# Altium PCB PROC091F.PcbDoc (part 5 of 8)
Units mil, origin at the board's own origin, x right, y up, seen from the top; angles counter-clockwise.
Board outline 3590.95 x 906.17 mil, 8 copper layers (Top Layer, GND1, Sig1, PWR1, PWR2, Sig2, GND2, Bottom Layer), stack 63.146 mil thick; 420 components, 316 nets, 1432 pads, 774 vias.
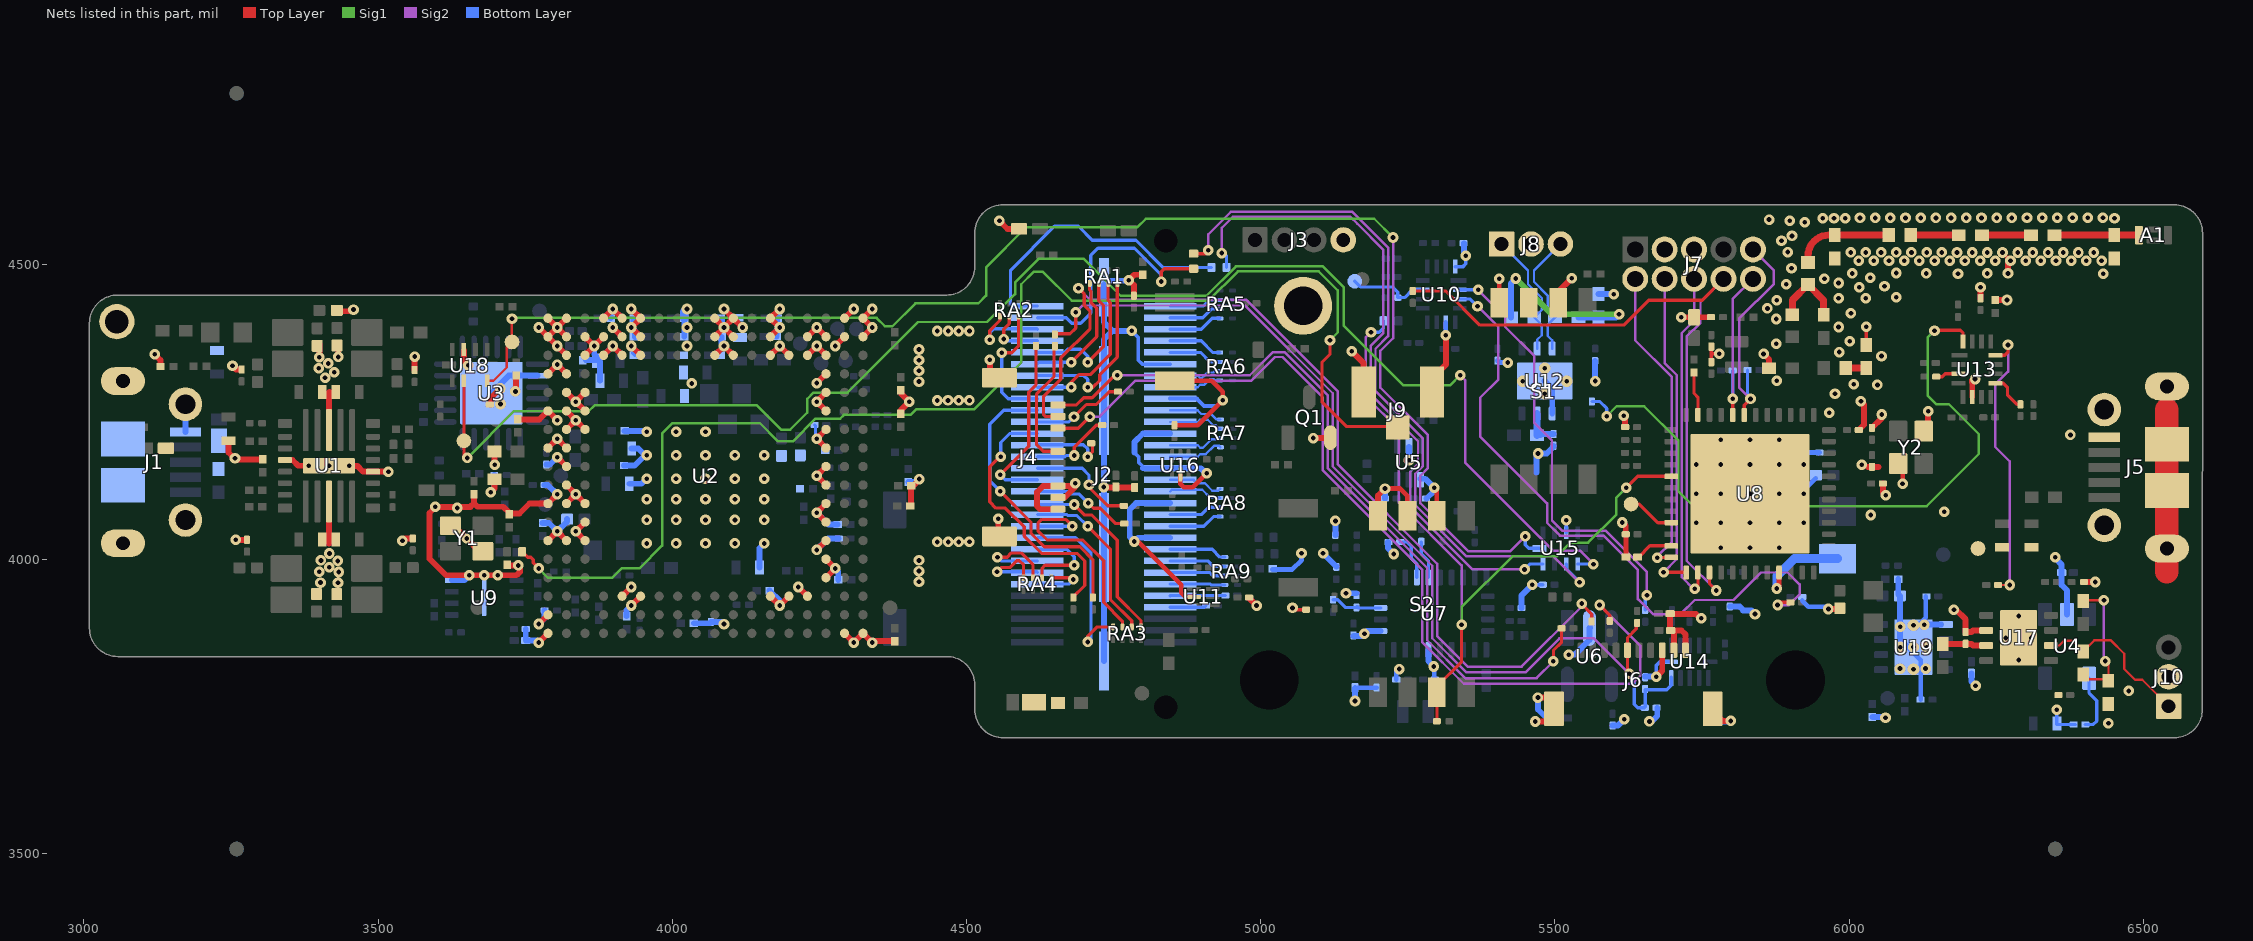
[diagram p10: the nets of this part, all layers, seen from the top]

## Via types
v1: diameter 18, hole 8, Top Layer to Bottom Layer, tented both sides, 737 vias
v2: diameter 19.68, hole 7.87, Top Layer to Bottom Layer, tented both sides, 36 vias
v3: diameter 17, hole 8, Top Layer to Bottom Layer, tented both sides, 1 vias

## Nets (pads, with @x,y where several pads share a name; then routed paths per layer and width w, separated by ;. In a path a pad name is that pad's centre, name@x,y a point inside that pad or via, vN(x,y) a via of type N, cw(c..) or ccw(c..) an arc to the next point about the centre after c; other vN are vias at no path point) (continued)
BOOTN: R80.2 R96.1 U7.4 | length 89.9
  Bottom Layer w5.5: R80.2@5123,3931 5130.87,3931 5142.87,3919 5143,3919 ; 5142,3920 5143,3919 ; R96.1@5162.8,3917.57 5144.43,3917.57 5143,3919 ; R96.1@5162.8,3919 R96.1@5163.76,3919 ; R96.1@5165,3919 R96.1@5163.76,3919 ; U7.4@5203.84,3917.06 5165.69,3917.06 R96.1@5163.76,3919
BREAK_RS232RX: TP19.1 U15.6 U18.7 | length 2663.5
  Top Layer w5.5: U18.7@3645.95,4303.01 TP19.1@3645.95,4200.94 3645.95,4177.64 v1(3651.7,4171.89)
  Sig1 w4.2: v1(3651.7,4171.89) 3651.8,4171.89 3731.31,4251.4 3858.11,4251.4 3867.87,4261.15 4143.84,4261.15 4184.81,4220.18 4200.56,4220.18 4229.37,4248.99 4229.37,4272.16 4240.11,4282.89 4297.89,4282.89 4417.91,4402.91 4534.91,4402.91 4582.46,4450.46 4582.46,4470.35 4622.27,4510.16 4699.37,4510.16 4761.92,4447.6 4908.02,4447.6 4957.82,4497.4 5105.6,4497.4 5141.34,4461.66 5141.34,4396.41 5242.09,4295.66 5322.29,4295.66 v1(5339,4312.38)
  Sig2 w4.2: v1(5339,4312.38) 5347.73,4303.65 5347.73,4248.79 ; 5347.71,4215.22 5347.71,4248.78 ; 5347.73,4215.21 5347.73,4163.41 5496.63,4014.5 5542.33,4014.5 v1(5565.37,3991.46)
  Bottom Layer w5.5: U15.6@5538.73,3991.77 5539.04,3991.46 v1(5565.37,3991.46)
BREAK_RS232TX: TP18.1 U15.10 U18.9 | length 2513.4
  Top Layer w4.2: U18.9@3685.32,4303.01 3695.92,4303.01 3718.72,4325.81 3718.72,4360.18 TP18.1@3727.56,4369.01 v1@3727.56,4409.77
  Sig1 w4.2: v1@3727.56,4409.77 4347.13,4409.77 4361.3,4395.61 4373.97,4395.61 4413.02,4434.66 4519.99,4434.66 4533.24,4447.91 4533.24,4495.82 4601.57,4564.15 4790.54,4564.15 4804.73,4578.34 5192.99,4578.34 v1(5224.85,4546.48)
  Sig2 w4.2: v1(5224.85,4546.48) 5224.85,4375.38 5203.48,4354.01 5203.48,4291.19 5284.08,4210.6 5284.08,4154.51 5271.03,4141.47 5271.03,4095.28 5353.32,4012.99 5423.87,4012.99 v1(5449.37,4038.49)
  Bottom Layer w5.5: v1(5449.37,4038.49) 5449.37,4024.34 5455.37,4018.34 U15.10@5473.77,4018.34
  other v1: 3727.56,4408.57
"BT ENABLE": R30.1 R110.1 S2.3 U8.17 | length 1280.9
  Top Layer w5.5: R110.1@5299.37,3724.46 S2.3@5299.37,3773.46 5299.37,3783.46 5341.37,3825.46 v1(5341.37,3888.46) ; v1(5621,4121) 5640.64,4140.64 U8.17@5697.71,4140.64
  Sig1 w4.2: v1(5341.37,3888.46) 5341.37,3918.37 5427.68,4004.68 5502.99,4004.68 5526.3,4028 5556.37,4028 5604.37,4076 5604.37,4104.37 v1(5621,4121)
  Sig2 w4.2: v1(5187.37,4385.46) 5178.28,4376.37 5178.28,4276.72 5234.87,4220.13 5234.87,4095.8 5341.37,3989.3 v1(5341.37,3888.46)
  Bottom Layer w5.5: v1(5187.37,4385.46) 5201.11,4385.46 5208.7,4393.06 R30.1@5208.7,4404.87
BT_RST: R91.2 U10.3 | length 1123.3
  Top Layer w5.5: v1(5878.37,3921.94) 5882.89,3926.46 R91.2@5900.13,3926.46
  Sig2 w4.2: v1(5368.37,4429.85) 5403.87,4394.36 5403.87,4305.15 5372.93,4274.2 5372.93,4238.35 ; 5372.91,4225.66 5372.91,4238.34 ; 5372.93,4225.65 5372.93,4208.47 5486.6,4094.79 5486.6,4061.8 5508.4,4040 5582.47,4040 5641.07,3981.4 5641.07,3932.13 5666.73,3906.46 5713.69,3906.46 5737.69,3930.46 5803.46,3930.46 5850.2,3977.2 5895.63,3977.2 5915.77,3957.07 5915.77,3939.99 5897.72,3921.94 v1(5878.37,3921.94)
  Bottom Layer w5.5: U10.3@5338.3,4441.85 5356.37,4441.85 v1(5368.37,4429.85)
BT_UART_RX: J7.9 R90.2 U8.7 | length 384
  Top Layer w5.5: U8.7@5821.73,4244.97 5821.76,4245 5821.76,4261.53 v1(5832.37,4272.14)
  Sig2 w4.2: v1(5832.37,4272.14) 5813,4291.51 5813,4408.67 5872,4467.67 5872,4490.65 J7.9@5836.47,4526.19
  Bottom Layer w5.5: R90.2@5827.38,4321.29 5827.38,4277.13 v1(5832.37,4272.14)
BT_UART_TX: J7.10 R102.2 U8.8 | length 293.4
  Top Layer w5.5: U8.8@5802.04,4244.97 v1(5802.04,4272.45)
  Sig2 w4.2: v1(5802.04,4272.45) 5802.04,4441.76 J7.10@5836.47,4476.19
  Bottom Layer w5.5: v1(5802.04,4272.45) R102.2@5802.04,4320.41
CAN1_FD_RX: R127.2 U13.3 | length 39.7
  Top Layer w5.5: R127.2@6148,4310 6158.12,4310 6163,4314.88 U13.3@6185.63,4314.88
CAN1_FD_TX: R123.2 U13.16 | length 1168.2
  Top Layer w5.5: v1(6145,4388) 6146,4389 6189,4389 6193.5,4384.5 U13.16@6193.5,4370
  Sig1 w4.2: v1(5588,4242.75) 5604.92,4259.66 5651.61,4259.66 5710,4201.27 5710,4115 5735,4090 5992.27,4090 5992.45,4090.18 6131.82,4090.18 6220.3,4178.66 6220.3,4212.34 6169.34,4263.3 6147.7,4263.3 6133.3,4277.7 6133.3,4376.3 v1(6145,4388)
  Bottom Layer w5.5: R123.2@5563,4267.77 5576.23,4267.77 5588,4256 v1(5588,4242.75)
CAN2_FD_RX: R120.2 U13.9 | length 65
  Top Layer w5.5: U13.9@6248.62,4299.13 6262,4299.13 6269,4292.13 6269,4279.1 6285.1,4263 R120.2@6291,4263
CAN2_FD_TX: R116.2 U13.12 | length 483.1
  Top Layer w4: R116.2@6252.99,3956 v1(6272.97,3956)
  Top Layer w5.5: U13.12@6248.62,4346.38 6264.28,4346.38 6270,4352.1 v1(6270,4364)
  Sig2 w4.2: v1(6270,4364) 6270,4318.7 6248,4296.7 6248,4191 6272.97,4166.03 v1(6272.97,3956)
CLKSEL0: R82.2 U7.10 | length 65.5
  Bottom Layer w5.5: R82.2@5272.85,4029.17 5272.85,4009.38 5285.04,3997.19 U7.10@5285.04,3968.74
CONN_AR_RS232RX: R14.2 U15.7 | length 1259.6
  Top Layer w5.5: R14.2@4886,4519.05 4906.72,4519.05 v1@4911,4523.33
  Sig2 w4.2: v1(4911,4525) 4911,4551.96 4949.04,4590 5155.96,4590 5216.44,4529.52 5216.44,4378.86 5195.08,4357.49 5195.08,4285.49 5275.68,4204.89 5275.68,4157.99 5262.63,4144.95 5262.63,4091.8 5349.84,4004.59 5497.75,4004.59 v1(5541.83,3960.5)
  Bottom Layer w5.5: U15.7@5519.05,3991.77 5519.05,3983.29 v1(5541.83,3960.5)
CONN_AR_RS232TX: R12.2 U15.9 | length 1135.8
  Sig2 w4.2: v1(4934,4520) 4934,4563.08 4952.46,4581.54 5152.55,4581.54 5164.08,4570 5208.05,4526.04 5208.05,4383.58 5186.68,4362.22 5186.68,4280.81 5267.28,4200.22 5267.28,4161.47 5254.23,4148.43 5254.23,4088.32 5360.12,3982.44 v1(5448.37,3982.44)
  Bottom Layer w5.5: v1(4934,4520) 4936.91,4520 4941.96,4514.95 R12.2@4941.96,4495.46 ; v1(5448.37,3982.44) 5457.7,3991.77 U15.9@5479.68,3991.77
DCDC_SW: L7.1 U8.33 | length 165.6
  Top Layer w8: v1(5876.87,3950) 5880.78,3953.91 U8.33@5880.78,3977.25
  Bottom Layer w15: v1(5876.87,3950) 5876.87,3971.1 5906.6,4000.83 L7.1@5980.15,4000.83
DIO6_GLED: R17.1 U8.11 | length 74.9
  Top Layer w5.5: R17.1@5736.37,4317.15 5736.37,4281.63 5742.99,4275.01 U8.11@5742.99,4244.97
DISP: R168.2 U10.2 | length 739.6
  Sig2 w4.2: v1(5369.57,4457.6) 5415.3,4411.87 5415.3,4394.81 5465,4345.11 5465,4231.46 5495,4201.46 5495,4065.5 5512.1,4048.4 5585.95,4048.4 5656.37,3977.98 v1(5656.37,3938.46)
  Bottom Layer w5.5: U10.2@5337.31,4457.6 v1(5369.57,4457.6) ; R168.2@5653.43,3913.58 5653.43,3935.52 v1(5656.37,3938.46)
DISP_T: C114.2 J6.5 R180.2 R181.1 R182.1 U14.5 | length 1724.1
  Top Layer w5.5: R182.1@4650.14,4382.85 4675.87,4382.85 4685.68,4392.66 v1(4685.68,4419.55) ; v1(5626.13,3805.38) 5623.32,3808.19 J6.5@5623.32,3845.06 5623.32,3866.63 5638.29,3881.6 R181.1@5638.29,3890.63
  Sig2 w4.2: v1(4685.68,4419.55) 4697.08,4430.95 4973.3,4430.95 5122.43,4281.83 5122.43,4157.66 5291.47,3988.61 5291.47,3865.5 5349.4,3807.57 5449.92,3807.57 5507.5,3865.15 5566.37,3865.15 v1(5626.13,3805.38)
  Bottom Layer w5.5: v1(5626.13,3805.38) 5634.82,3796.69 5634.82,3753.22 5640.7,3747.34 5651.73,3747.34 5653.37,3748.99 5653.37,3778.13 5690.11,3778.13 5697.73,3785.75 U14.5@5697.73,3797.8 U14.5@5697.73,3799.77
GND: C1.1 C2.1 C3.1 C4.2 C5.2 C6.1 C7.2 C8.2 C9.1 C10.1 C11.2 C12.1 C13.1 C14.1 C15.2 C16.2 C17.2 C18.2 C19.2 C20.2 C21.1 C23.2 C24.2 C25.2 C26.2 C27.2 C28.2 C29.2 C30.2 C31.2 C32.2 C33.2 C34.2 C35.2 C36.2 C37.2 C38.2 C39.2 C40.2 C41.2 C42.1 C43.1 C44.2 C45.2 C46.2 C47.2 C48.2 C49.2 C50.2 C51.2 C52.2 C53.2 C54.2 C55.2 C56.2 C57.2 C58.2 C59.2 C60.2 C61.2 C62.2 C63.2 C64.2 C65.2 C66.2 C67.2 C68.2 C69.2 C70.2 C71.1 C72.1 C73.2 C74.2 C75.2 C76.2 C77.2 C78.2 C79.2 C80.2 C81.2 C82.2 C83.2 C84.2 C85.2 C86.2 C87.2 C88.2 C89.2 C90.2 C91.2 C92.2 C94.2 C95.2 C96.2 C97.2 C98.2 C100.2 C101.2 C102.2 C103.2 C104.2 C105.1 C106.1 C107.2 C108.1 C109.1 C110.1 C114.1 C115.2 C116.2 C117.2 C118.2 C119.2 C120.2 C122.2 C123.2 C125.2 C126.2 C127.2 C128.2 C129.2 C130.2 J1.5 J1.6 J1.7 J1.8 J1.9 J1.10 J1.11 J2.20 J2.26 J2.32 J2.38 J2.44 J2.50 J2.MP1 J2.MP2 J2.MP3 J2.MP4 J3.4 J4.8 J4.9 J4.10 J4.11 J4.12 J5.5 J5.6 J5.7 J5.8 J5.9 J5.10 J5.11 J6.8 J6.9 J6.10 J6.11 J6.12 J7.3 J7.5 J8.2 J9.2@5174.89,4283.6 J9.3@5291.03,4283.6 J10.2 LD1.2 LD2.2 LD6.2 Q1.2 R3.2 R15.1 R24.1 R29.1 R37.1 R42.2 R52.1 R65.1 R69.1 R73.1 R92.2 R93.2 R96.2 R98.2 R122.2 R125.1 R134.2 R141.2 R158.1 R170.1 R172.1 R180.1 S1.6 S1.7 S1.8 S2.6 S2.7 S2.8 SW2.2 TP12.1 TP15.1 TP20.1 U1.4 U1.11 U1.17 U1.24 U1.27 U2.A1 U2.A2 U2.A6 U2.A8 U2.A11 U2.A13 U2.A15 U2.A17 U2.A18 U2.B6 U2.B8 U2.B9 U2.B10 U2.B11 U2.B12 U2.B13 U2.B14 U2.B15 U2.B16 U2.B17 U2.B18 U2.C6 U2.C7 U2.C8 U2.C12 U2.C13 U2.C14 U2.C16 U2.C17 U2.D16 U2.D17 U2.D18 U2.E3 U2.E16 U2.E17 U2.E18 U2.F3 U2.F16 U2.F17 U2.F18 U2.K16 U2.K17 U2.K18 U2.L16 U2.L17 U2.L18 U2.N3 U2.N16 U2.N17 U2.N18 U2.P3 U2.P16 U2.R3 U2.R16 U2.R17 U2.T4 U2.T5 U2.T6 U2.T7 U2.T8 U2.T9 U2.T10 U2.T11 U2.T12 U2.T13 U2.T14 U2.T15 U2.T16 U2.T17 U2.U1 U2.U17 U2.U18 U2.V1 U2.V17 U2.V18 U3.2 U3.25 U4.2 U5.2 U5.4 U6.2 U7.2 U7.25 U8.49 U9.4 U9.9 U10.6 U10.16 U11.2 U12.2 U12.9@5482.58,4302.51 U13.6 U14.6 U15.3 U16.2 U17.2 U17.9@6287.97,3866 U18.3 U19.5 U19.9@6109.37,3850.46 Y1.2 Y1.4 Y2.2 Y2.4 | length 10328
  Top Layer w5.5: C40.2@4980.39,3933.61 C40.2@4980.39,3934.38 ; v1(5054,3917) 5056.96,3914.04 R125.1@5077.13,3914.04 ; C20.2@5765.79,4334.83 5765.79,4349 ; C19.2@5765.79,4361.03 5765.79,4349 ; v1(5779,4348.8) 5778.8,4349 5765.79,4349 ; C21.1@6028.92,4363.78 v1(6028.92,4395.08) ; v1@6223,4462 v1(6223.22,4461.78) ; v1(6268.28,4440.28) v1@6269,4441
  Top Layer w8: v1(4785.33,4029.82) 4791.76,4029.82 4865.14,3956.44 4865.14,3943.16 4872.16,3936.15 4886.95,3936.15 U11.2@4886.95,3935.72 ; C72.1@4853.37,4227.49 4893.14,4227.49 v1(4935.65,4270) 4935.65,4284.18 4916.82,4303.01 SW2.2@4854.16,4303.01 ; U16.2@4863.37,4143.71 4863.37,4127.78 4869.25,4121.9 4884.53,4121.9 v1(4908.49,4145.87) ; v1(5211.17,4119.83) 5236.79,4119.83 5249.16,4107.46 5249.16,4073.68 S2.7@5249.37,4073.46 ; v1(5294.73,4121.32) 5299.37,4116.68 S2.6@5299.37,4073.46 ; S1.8@5405.37,4435.46 v1(5405.37,4476.19) ; C26.2@5620.36,4042.21 5620.64,4041.92 C24.2@5620.64,4003.46 ; v1(6090.77,4128.23) 6090.91,4128.38 Y2.2@6090.91,4162.29 ; v1@6158.96,4082.88 v1(6161.37,4080.46) v1@6162.37,4081.46
  Top Layer w10: v1(3120.4,4348.11) 3130.38,4338.13 R52.1@3130.38,4327.36 ; C1.1@3245.8,4201.22 3245.8,4181.13 v1@3254.84,4172.09 ; v1(3252.64,4328.46) 3252.64,4327.94 3258.45,4322.12 C32.2@3267.13,4322.12 ; v1(3256.91,4171.34) 3258.71,4169.54 C30.2@3304,4169.54 ; v1(3258.02,4032.76) C34.2@3277.23,4032.76 ; U1.17@3341.81,4168.36 3354.6,4168.36 3364.41,4158.56 3372.36,4158.56 ; v1@3399.92,4344.56 v1@3400.21,4344.85 ; v1@3400.21,4343.85 v1@3400.21,4344.85 ; C45.2@3400.21,4363.56 v1@3400.21,4344.85 ; C45.2@3400.21,4364.56 C45.2@3400.5,4364.85 ; U1.24@3416.61,4097.89 3416.61,4026.67 3416.67,4026.6 ; v2(3416.61,4158.52) v2(3450.86,4158.52) 3464.72,4158.52 3474.56,4148.68 U1.4@3491.41,4148.68 3517.45,4148.68 v1(3517.61,4148.52) ; U1.11@3416.61,4219.15 3416.61,4283.53 3417.5,4284.42 ; C77.2@3429.9,4421.17 3455.37,4421.17 v1(3458.2,4424) ; v1@3432.13,4345.03 v1@3432.43,4345.32 ; v1@3432.43,4344.32 v1@3432.43,4345.32 ; C44.2@3432.43,4364.04 v1@3432.43,4345.32 ; C44.2@3432.43,4365.04 C44.2@3432.72,4365.33 ; v1(3541.4,4031) 3545.52,4035.11 C33.2@3559.04,4035.11 ; C31.2@3562.13,4321.23 3562.13,4343.87 v1(3562.47,4344.2) ; Y1.4@3622.98,4056.69 3628.88,4056.69 v3(3650.54,4035.03) 3672.19,4013.38 Y1.2@3678.09,4013.38 ; Y1.4@3623.17,4054.18 Y1.4@3629.39,4054.18 ; U18.3@3645.95,4354.59 3645.95,4336.82 v1(3653.37,4329.4) ; R15.1@3663,4110.46 3663,4095 ; Y1.2@3672.7,4010.87 Y1.2@3678.28,4010.87 ; C126.2@3690.95,4262.91 3690.95,4273.3 v1(3707.55,4289.9) ; v1(3691.74,4113.6) 3697.82,4119.68 C89.2@3697.82,4135.45 ; C90.2@3697.69,4182.85 3697.69,4160.66 v1@3697.82,4160.53 ; C14.1@3724.34,3990.34 3725.45,3989.23 v1(3738.48,3989.23) 3741.28,3989.23 3741.28,3978.28 3735.46,3972.46 v1(3703.21,3972.46) v1(3655,3972.46) 3615.61,3972.46 3587.57,4000.5 3587.57,4078.41 3597.96,4088.8 3656.8,4088.8 3663,4095 ; v1(3733.44,4284.91) 3734.67,4286.14 C69.2@3734.67,4311.95 ; C63.2@3737.19,4237.51 3774.43,4237.51 U2.A13@3788.76,4251.85 v1(3804.51,4236.1) ; v1(3773.02,3858.15) U2.A1@3788.76,3873.89 ; v1(3773.02,3889.64) U2.A2@3788.76,3905.39 ; v1(3773.02,4393.58) U2.A17@3788.76,4377.83 ; U2.A6@3788.76,4031.37 v1(3804.51,4047.12) U2.B6@3820.26,4031.37 ; U2.A11@3788.76,4188.85 v1(3804.51,4204.6) U2.B11@3820.26,4188.85 ; U2.A15@3788.76,4314.84 v1(3804.51,4330.59) U2.B15@3820.26,4314.84 ; U2.A18@3788.76,4409.33 v1(3804.51,4393.58) ; v1(3804.51,4110.11) U2.A8@3788.76,4094.37 3757.27,4094.37 3740.54,4077.64 3724.16,4077.64 3724.16,4077.57 C71.1@3722.86,4076.27 3722.86,4079.14 3713,4089 3669,4089 3663,4095 ; v1(3804.51,4173.11) U2.B10@3820.26,4157.36 ; U2.B8@3820.26,4094.37 v1(3836.01,4110.11) ; U2.B9@3820.26,4125.86 v1(3836.01,4110.11) ; U2.B12@3820.26,4220.35 v1(3836.01,4236.1) ; U2.B13@3820.26,4251.85 v1(3836.01,4236.1) ; U2.B14@3820.26,4283.34 v1(3836.01,4267.59) ; U2.B16@3820.26,4346.33 v1(3804.51,4362.08) U2.A17@3788.76,4377.83 ; U2.B17@3820.26,4377.83 v1(3804.51,4393.58) ; U2.B18@3820.26,4409.33 v1(3804.51,4393.58) ; U2.C6@3851.76,4031.37 v1(3836.01,4047.12) U2.C7@3851.76,4062.87 ; U2.C8@3851.76,4094.37 v1(3836.01,4110.11) ; U2.C12@3851.76,4220.35 v1(3836.01,4236.1) ; U2.C13@3851.76,4251.85 v1(3836.01,4267.59) ; U2.C14@3851.76,4283.34 v1(3836.01,4267.59) ; U2.C16@3851.76,4346.33 v1(3867.5,4362.08) ; U2.C17@3851.76,4377.83 v1(3867.5,4362.08) ; U2.D16@3883.25,4346.33 v1(3899,4362.08) U2.E16@3914.75,4346.33 ; U2.D17@3883.25,4377.83 v1(3867.5,4362.08) ; U2.D18@3883.25,4409.33 v1(3899,4425.07) U2.E18@3914.75,4409.33 ; v1(3899,4393.58) U2.E17@3914.75,4377.83 ; U2.E3@3914.75,3936.89 v1(3930.5,3952.63) ; v1(3930.5,3921.14) U2.F3@3946.24,3936.89 ; v1(3930.5,4362.08) U2.F16@3946.24,4346.33 ; v1(3930.5,4425.07) U2.F18@3946.24,4409.33 v1(3930.5,4393.58) U2.F17@3946.24,4377.83 ; U2.K16@4072.23,4346.33 v1(4087.98,4362.08) U2.L16@4103.72,4346.33 ; U2.K17@4072.23,4377.83 v1(4087.98,4393.58) ; U2.K18@4072.23,4409.33 v1(4087.98,4393.58) ; v1(4087.98,4425.07) U2.L18@4103.72,4409.33 ; U2.L17@4103.72,4377.83 v1(4087.98,4393.58) ; v1(4119.47,4393.58) U2.L18@4103.72,4409.33 ; U2.N3@4166.72,3936.89 v1(4182.46,3921.14) U2.P3@4198.21,3936.89 ; U2.N16@4166.72,4346.33 v1(4182.46,4362.08) U2.P16@4198.21,4346.33 ; U2.N17@4166.72,4377.83 v1(4182.46,4393.58) U2.N18@4166.72,4409.33 v1(4182.46,4425.07) ; v1(4213.96,3952.63) U2.R3@4229.71,3936.89 ; U2.R16@4229.71,4346.33 v1(4245.46,4362.08) U2.T16@4261.2,4346.33 ; U2.R17@4229.71,4377.83 v1(4245.46,4393.58) U2.T17@4261.2,4377.83 ; v1(4245.46,4015.63) U2.T6@4261.2,4031.37 ; v1(4245.46,4299.09) U2.T15@4261.2,4314.84 ; U2.T4@4261.2,3968.38 v1(4276.95,3984.13) U2.T5@4261.2,3999.88 ; U2.T7@4261.2,4062.87 v1(4245.46,4078.62) U2.T8@4261.2,4094.37 ; U2.T9@4261.2,4125.86 v1(4245.46,4141.61) U2.T10@4261.2,4157.36 ; U2.T11@4261.2,4188.85 v1(4245.46,4204.6) U2.T12@4261.2,4220.35 ; U2.T13@4261.2,4251.85 v1(4245.46,4267.59) U2.T14@4261.2,4283.34 ; v1(4276.95,4362.08) U2.U17@4292.7,4377.83 ; U2.U1@4292.7,3873.89 v1(4308.45,3858.15) U2.V1@4324.2,3873.89 v1(4339.94,3858.15) 4342.43,3860.63 C60.2@4378.33,3860.63 ; U2.U18@4292.7,4409.33 v1(4308.45,4425.07) ; U2.V17@4324.2,4377.83 v1(4339.94,4393.58) U2.V18@4324.2,4409.33 v1(4339.94,4425.07) ; C96.2@4388.37,4246.78 4388.37,4252.87 v1(4402.94,4267.44) 4388.37,4282.01 C98.2@4388.37,4286.73 ; C102.2@4405.36,4090.24 4405.93,4090.82 C88.2@4405.93,4124.76 4409.76,4124.76 v1@4421,4136 ; v1(4539.65,4338.94) 4539.65,4317.15 4548.63,4308.18 J4.11@4554.03,4308.18 ; J4.12@4554.03,4038.49 v1(4554.03,4068.8) ; v1(4555.92,4574.89) 4569.75,4561.07 LD2.2@4589.4,4561.07 ; J4.10@4655.33,4084.75 4625.21,4084.75 4619.91,4090.06 4619.91,4113.73 4630.3,4124.12 4680.13,4124.12 v1(4684.89,4128.88) 4684.89,4122.77 4666.56,4104.44 J4.9@4655.33,4104.44 ; v1(4733.36,4122.4) 4734.36,4121.4 4785.08,4121.4 C15.2@4785.89,4120.59 ; C120.2@4784.37,4447.48 4784.37,4465.69 v1(4775.99,4474.07) 4785.12,4483.2 R42.2@4799.25,4483.2 ; C40.2@4980.39,3933.61 v1(4993,3921) ; v1(5089.21,4205.68) 5117.78,4205.68 Q1.2@5118.39,4206.3 ; v1(5154.58,4353) 5174.89,4332.69 J9.2@5174.89,4283.6 ; S2.8@5199.37,4073.46 5199.37,4108.03 v1(5211.17,4119.83) ; J9.3@5291.03,4283.6 5291.03,4306.87 5314.67,4330.52 v1(5314.67,4380.2) ; v1(5466.64,3724.08) 5491.87,3724.08 5498.32,3730.54 5498.32,3756.69 5490.34,3764.68 v1(5471.07,3764.68) ; S1.6@5505.37,4435.46 5505.37,4454.46 v1(5528.37,4477.46) ; v1@5615.36,4062.2 5620.36,4057.2 C26.2@5620.36,4042.21 ; v1(5617.05,4243.42) 5617.05,4241.67 5619.36,4239.36 C25.2@5619.36,4224.38 ; v1(5672.33,3800.17) 5682.38,3810.22 J6.8@5682.38,3845.06 ; J6.9@5702.06,3842.06 C116.2@5702.06,3874.39 ; v1(5714.87,4411.08) LD6.2@5736.37,4411.08 C37.2@5765.37,4411.08 ; J6.10@5721.75,3845.06 5721.75,3872.09 5715.09,3878.74 C116.2@5696.56,3878.74 5695.85,3879.45 C115.2@5695.85,3907.2 5696.59,3906.46 5739.58,3906.46 5746.58,3899.46 v1(5748.74,3899.46) ; J6.12@5774.81,3767.91 5768.01,3761.12 5768.01,3742.65 5785.66,3725 v1(5798.82,3725) ; v1(5854.59,4348.67) 5863.91,4339.35 C23.2@5863.91,4324.42 ; v1@5964.75,3914.88 5976.37,3914.88 5981.02,3919.54 C28.2@5984.12,3916.44 ; C36.2@6016.45,4219.38 6025.38,4228.31 6025.38,4262.62 v1(6020,4268) ; 6032.1,4156.74 C18.2@6038.8,4156.74 6049.57,4156.74 ; C17.2@6038.8,4222.96 6055.37,4239.52 v1(6055.37,4245.75) ; C27.2@6057.38,4128.46 6057.38,4113.48 v1(6062.38,4108.48) ; Y2.4@6134.22,4217.41 6134.3,4217.48 6134.3,4251.39 v1(6134.37,4251.46) ; v1(6178,3914) 6181.58,3914 6197.97,3897.62 C108.1@6197.97,3876.02 ; C108.1@6197.97,3876.02 6207.97,3876 6210.76,3878.8 U17.2@6232.85,3878.8 ; U13.6@6209.25,4275.51 v1@6209.25,4299.75 ; C107.2@6223.22,4443.23 v1(6223.22,4461.78) ; R141.2@6248.22,4440.28 v1(6268.28,4440.28) ; v1(6269.98,4485.46) v1@6269.98,4511.09 ; R134.2@6399,3961 v1(6417.97,3961) ; v1@6474.69,3776.31 v1(6475,3776) ; U2.A17@3788.76,4377.83 v1(3804.51,4393.58) ; v1(4087.98,4393.58) U2.L18@4103.72,4409.33 ; v1@6209.25,4299.75 6209.25,4304.25 6209,4304 6209,4300 v1@6209.25,4299.75
  Top Layer w40: 6540,3978.57 J5.6@6540,4017.94 6540,4041.56 J5.7@6540,4116.36 J5.8@6540,4195.1 6540,4254.16
  Bottom Layer w5.5: v1(3930.5,4362.08) 3932.89,4359.69 3932.89,4349.72 C74.2@3936.37,4346.23 ; C57.2@4179.44,4409.4 4180.95,4410.91 4180.95,4423.56 v1(4182.46,4425.07) ; C130.2@4241.68,4228 4243.57,4226.11 4243.57,4206.49 v1(4245.46,4204.6) 4257.65,4192.4 4257.65,4187.6 C61.2@4259.95,4185.3 ; C6.1@5211,4103.02 C6.1@5211.17,4103.18 ; v1(5461.4,3956.46) C123.2@5479.37,3956.46 ; U15.3@5519.05,4044.92 v1(5519.05,4066.14) ; C106.1@5574,4450.19 C106.1@5574.31,4450.51 ; v1(6352.97,3744.15) C7.2@6352.97,3720.79 6352.97,3718.79 6384.16,3718.79 C8.2@6384.37,3719.01
  Bottom Layer w6: v1(4780.88,4387.88) 4792.16,4376.6 4792.16,4337.77 4798.42,4331.51 J2.50@4846.16,4331.51 ; 4785.32,4181.08 4792.37,4174.03 4792.37,4164.78 4800.11,4157.04 4800.11,4154.34 ; U10.16@5330.42,4496.49 5342.97,4496.49 5348.5,4502.02 v1(5348.5,4515.71) ; v1(5672.33,3800.17) 5672.33,3819.17 5678.53,3825.36 U14.6@5697.73,3825.36
  Bottom Layer w7: J2.44@4846.16,4272.63 4891.24,4272.63 4903.66,4260.22 4925.86,4260.22 v1(4935.65,4270)
  Bottom Layer w8: R37.1@5019.38,3982.46 5053.74,3982.46 5069.37,3998.09 v1(5069.37,4009.96) ; C11.2@5160.25,3781.63 5160.29,3781.59 5197.06,3781.59 C9.1@5197.1,3781.54 ; C38.2@5230.57,3795.13 5230.37,3795.33 5230.37,3808.06 v1(5235.37,3813.06) ; v1(5294.12,3817.45) 5295.06,3816.51 5295.06,3796.24 C39.2@5296.01,3795.3 ; v1(5314.67,4380.2) U10.6@5314.67,4402.48 ; C105.1@5402.37,4337.36 5405.79,4333.94 v1(5419.81,4333.94) ; 5920.49,3929.46 5930.82,3919.14 5960.8,3919.14 v1(5964.75,3915.18) ; v2(5923.1,4111.11) 5923.1,4117.1 C29.2@5943.47,4137.46 ; v2@5923.35,4160.46 v2(5923.1,4160.71) 5923.1,4172.87 5931.49,4181.25 C35.2@5949.53,4181.25 C35.2@5948.36,4180.08 ; U19.9@6099.37,3850.46 6121.45,3828.38 C128.2@6121.45,3761.12 ; U19.9@6118.62,3888.85 6130.36,3900.59 C127.2@6130.36,3936.75
  Bottom Layer w10: J1.5@3172.66,4215.96 J1.10@3172.66,4263.2 ; U9.4@3625.17,3964.2 3646.74,3964.2 v1(3655,3972.46) ; v1(3691.74,4113.6) 3697.53,4119.4 R65.1@3697.53,4143.04 ; U3.25@3692.64,4282.2 3722.17,4311.72 U3.2@3770.97,4311.72 ; C101.2@3751.01,3881.17 3751.01,3861.79 C100.2@3751.11,3861.69 3769.47,3861.69 v1(3773.02,3858.15) ; v1(3773.02,3889.64) 3783.12,3899.74 R3.2@3783.12,3912.76 ; C97.2@3779.79,4061.22 3790.41,4061.22 v1(3804.51,4047.12) 3821.32,4063.93 C48.2@3821.32,4067.82 ; C3.1@3782.96,4125.72 3788.9,4125.72 v1(3804.51,4110.11) ; C2.1@3785.88,4160.73 3792.14,4160.73 v1(3804.51,4173.11) ; C67.2@3853,4338.02 3874.98,4338.02 C70.2@3876,4337 ; v1(3867.5,4362.08) 3867.5,4347.58 C70.2@3876,4339.08 ; C73.2@3877,4303 3877,4336 C70.2@3876,4337 ; C68.2@3895.39,4409.24 3895.39,4421.47 v1(3899,4425.07) ; v1(3899,4362.08) C70.2@3876,4339.08 ; C64.2@3918.02,4159 3936,4159 3953.61,4176.61 3942.22,4188 C65.2@3931,4188 ; C66.2@3919.05,4218 3955.09,4218 v1(3956.48,4216.61) ; C95.2@3922.37,3902.78 3922.37,3913.01 v1@3930.78,3921.43 ; C62.2@3927,4128 3947.87,4128 v1(3956.48,4136.61) ; C75.2@3934.43,4409.11 3934.35,4409.02 3934.35,4397.43 v1(3930.5,4393.58) 3936.37,4387.7 C76.2@3936.37,4377.73 ; C84.2@4020.26,4377.83 4020.26,4388.85 v1(4024.98,4393.58) 4020.26,4398.3 C85.2@4020.26,4409.33 ; C87.2@4036.64,3891.02 4063.65,3891.02 C92.2@4065.74,3893.11 4084.88,3893.11 v1@4088.4,3889.59 ; C80.2@4083.77,4377.76 4083.77,4366.29 v1(4087.98,4362.08) ; C81.2@4084.39,4409.24 4084.39,4397.16 v1(4087.98,4393.58) ; C59.2@4148.3,3985.94 4148.3,4018.43 v1(4156.48,4026.61) ; R170.1@4165.37,3946.46 4182.46,3929.37 v1(4182.46,3921.14) ; C56.2@4177.39,4378.24 4177.39,4388.51 v1(4182.46,4393.58) 4177.74,4398.3 C57.2@4177.74,4409.33 ; v1(4245.46,4015.63) 4265,4035.17 C91.2@4282.98,4035.17 ; v1@4245.46,4079.47 v1(4245.46,4078.62) 4265.27,4058.8 C103.2@4280.95,4058.8 ; v1(4276.95,3984.13) 4282.16,3978.92 C94.2@4282.16,3964.68 ; R172.1@4401.11,4131.01 4413.91,4131.01 v1@4421,4138.1 ; v1@4421,4136 v1@4421,4138.1 ; v1@4422.04,4139.14 v1@4421,4138.1 ; J2.MP1@4733.36,3826.98 J2.MP2@4733.36,4019.5 v1(4733.36,4122.4) J2.MP3@4733.36,4269.5 4733.36,4373.14 4748.1,4387.88 ; v1@4775.99,4473.07 4741.12,4473.07 4731.72,4463.66 J2.MP4@4733.36,4462.02 4733.36,4402.63 4748.1,4387.88 ; v1(4780.88,4387.88) 4748.1,4387.88 ; 4785.32,4181.08 4785.32,4198.61 4800.11,4213.4 J2.38@4846.16,4213.4 ; 4800.11,4154.34 J2.32@4846.16,4154.34 4898.01,4154.34 v1@4908.49,4143.87 ; J2.20@4846.16,4036.23 4791.73,4036.23 v1(4785.33,4029.82) 4777.36,4037.79 4777.36,4084.26 4788.39,4095.29 J2.26@4846.16,4095.29 ; v1(5105.98,4009.88) 5105.98,4009.76 R98.2@5128.47,3987.27 ; R93.2@5126.93,4041.1 v1(5126.93,4064.83) ; v1(5144.97,3942) R96.2@5162.8,3942 ; C10.1@5157.67,3869.37 5172.73,3869.37 v1(5176.24,3872.88) 5181.05,3877.69 U7.2@5203.84,3877.69 ; v1(5160.25,3758.88) C11.2@5160.25,3780.47 ; C6.1@5211.17,4103.18 v1(5211.17,4119.83) ; C13.1@5216.16,4028.9 5216.16,4018.53 v1(5226.01,4008.68) ; v1(5251.98,4167.81) U5.2@5251.98,4190.93 ; U5.4@5271.66,4136.6 5279.45,4136.6 v1(5294.73,4121.32) 5294.73,4115.77 C125.2@5281.86,4102.9 ; U7.25@5285.04,3845.7 5285.04,3826.53 v1(5294.12,3817.45) ; C117.2@5345.41,4536.81 5345.41,4521.23 5348.5,4518.15 v1(5348.5,4515.71) ; R73.1@5443.38,3917.06 5443.38,3938.44 v1(5461.4,3956.46) ; 5468.82,4146.92 5468.82,4176.91 v1(5471.37,4179.46) 5486.08,4179.46 5497.81,4191.2 C43.1@5497.81,4192.56 ; v1(5471.07,3764.68) 5471.07,3744.55 5485.66,3729.96 R69.1@5500.05,3729.96 ; U12.9@5482.58,4302.51 5495.37,4289.72 U12.2@5495.37,4247.39 ; v1(5523.37,3837.67) 5533.86,3837.67 5558.54,3862.35 U6.2@5558.54,3882.87 ; U6.2@5560.04,3882.87 U6.2@5560.04,3883.76 ; v1(5568.37,4302.51) R122.2@5568.37,4336.6 ; C106.1@5574,4450.19 5599.81,4450.19 v1(5600,4450) ; C12.1@5598.06,3717.04 5606.75,3717.04 v1(5617.59,3727.88) ; R180.1@5653.37,3800.17 v1(5672.33,3800.17) ; v1(5660.61,3724.14) 5664.73,3724.14 5673.78,3733.19 C114.1@5673.78,3747.34 ; C118.2@5760.69,3723.85 5791.91,3723.85 5793.05,3725 v1(5798.82,3725) ; C119.2@5797.1,3919.22 5814.11,3919.22 5819.79,3913.54 5819.79,3912.93 5833.66,3912.93 v1(5840,3906.59) ; R92.2@6039.37,3731.63 6060.41,3731.63 v1(6061.75,3730.29) ; R29.1@6083.39,3965.94 6083.39,3940.34 R24.1@6086.28,3937.46 6086.28,3863.56 U19.9@6099.37,3850.46 ; U19.9@6118.62,3888.85 U19.5@6156.46,3888.85 ; C129.2@6207.77,3805.87 6207.77,3791.85 v1(6214.88,3784.74) ; v1(6350,4003) 6350,4001.72 6361.13,3990.59 C5.2@6361.13,3977 6361.13,3955.87 6370.37,3946.63 U4.2@6370.37,3905.76 ; C70.2@3876,4337 C70.2@3876,4339.08
  Bottom Layer w15: C85.2@4020.26,4409.33 4020.26,4420.35 v1(4024.98,4425.07)
  other v1: 6440.6,3720.9 6086.39,3813.91 6129.87,3813.91 6109.37,3850.46 6086.92,3884.93 6127.76,3888.2 4087.98,3889.59 3402.25,3960.12 3431.87,3959.79 4419.27,3961.6 3680.37,3972.46 3433.16,3978.06 3400.29,3978.58 4419.27,3979.67 3416.85,3985.95 3431.28,3996.91 3402.96,3997.73 4419.21,3997.72 3417.4,4009.53 3956.48,4026.61 4006.48,4026.61 4056.48,4026.61 4106.48,4026.61 4450.49,4029.21 4468.83,4029.2 4486.89,4029.2 4504.94,4029.26 5614.47,4062.2 3956.48,4066.61 4006.48,4066.61 4056.48,4066.61 4106.48,4066.61 4156.48,4066.61 6036.85,4074.88 3634.65,4086.8 3596.96,4088.8 3956.48,4101.61 4006.48,4101.61 4056.48,4101.61 4106.48,4101.61 4156.48,4101.61 4419.8,4136 4006.48,4136.61 4056.48,4136.61 4106.48,4136.61 4156.48,4136.61 6021.5,4160.3 3698.53,4160.53 3956.48,4176.61 4006.48,4176.61 4056.48,4176.61 4106.48,4176.61 4156.48,4176.61 6376,4211 4006.48,4216.61 4056.48,4216.61 5966,4248.79 3708.13,4263.57 4450.55,4269.58 4468.6,4269.63 4486.66,4269.63 4505,4269.63 5976,4281 6048,4296 6008,4297.07 4032.88,4298.48 4419.28,4301.68 5877,4303 6214,4306 3410,4308 3425.72,4317.55 4419.28,4320.01 3399.44,4324.26 3415.6,4332.5 4419.28,4338.08 3399.92,4343.06 3432.13,4343.53 6055,4345 5983,4351.83 4419.22,4356.13 4024.98,4362.08 5876,4366 6001,4370 4450.5,4387.61 4468.84,4387.61 4486.9,4387.61 4504.95,4387.61 5982,4394.36 5876,4408 6003,4418 5861.1,4426 5876.87,4440 5982,4443.5 6028,4443.5 6080,4445 6017,4462 6060,4463.52 5893,4467 5982,4469.13 5958,4476.19 6036,4478 6005.28,4485.46 6131,4485.46 6185,4485 6234.83,4485.46 6432,4485 6080.02,4486.15 5902,4494.19 6016.12,4506.8 6041.93,4506.8 6067.73,4506.79 6093.53,4506.79 6119.33,4506.79 6145.13,4506.79 6170.93,4506.79 6196.73,4506.79 6222.53,4506.79 6248.33,4506.79 6274.14,4506.79 6299.94,4506.78 6325.74,4506.78 6351.54,4506.78 6377.34,4506.78 6403.14,4506.78 6428.94,4506.78 6002.62,4521.11 6028.42,4521.11 6054.22,4521.11 6080.02,4521.1 6105.82,4521.1 6131.62,4521.1 6157.43,4521.1 6183.23,4521.1 6209.03,4521.1 6234.83,4521.1 6260.63,4521.1 6286.43,4521.1 6312.23,4521.1 6338.03,4521.1 6363.83,4521.09 6389.64,4521.09 6415.44,4521.09 5895.62,4521.71 5885,4541 5902.89,4549.16 5924.43,4572.55 5899,4575 5863.91,4577 5955.13,4579.22 5974.27,4579.2 5993.41,4579.19 6451,4579 6018.42,4579.82 6044.22,4579.82 6070.02,4579.82 6095.82,4579.82 6121.62,4579.82 6147.43,4579.82 6173.23,4579.82 6199.03,4579.83 6224.83,4579.83 6250.63,4579.83 6276.43,4579.83 6302.23,4579.83 6328.03,4579.83 6353.83,4579.83 6379.64,4579.83 6405.44,4579.83 6431.24,4579.84
  other v2: 6109.37,3813.06 6287.97,3828.6 6086.73,3850.46 6132.01,3850.46 6266.32,3866 6309.62,3866 6109.37,3887.86 6287.97,3903.4 5781.96,4019.57 5831.57,4019.57 5881.17,4019.57 5740.03,4061.5 5781.96,4061.5 5831.57,4061.5 5881.17,4061.5 5923.1,4061.5 5740.03,4111.11 5781.96,4111.11 5831.57,4111.11 5881.17,4111.11 3382.36,4158.52 5740.03,4160.71 5781.96,4160.71 5831.57,4160.71 5881.17,4160.71 5781.96,4202.64 5831.57,4202.64 5881.17,4202.64 5482.58,4280.86 5445.17,4302.51 5519.98,4302.51 5482.58,4324.17
HD_AR_BSS_LOGGER: J2.43 RA2.7 | length 216.7
  Top Layer w5.5: v1(4559.93,4350.86) 4576.93,4350.86 4588.48,4362.41 RA2.7@4588.48,4413.17
  Bottom Layer w5.5: v1(4559.93,4350.86) 4559.93,4283.34 4570.82,4272.45 J2.43@4620.57,4272.45
HD_AR_CS1: J2.19 RA3.8 | length 314.3
  Top Layer w5.5: v1(4706.14,3859.2) 4706.14,3868.7 4722.1,3884.67 RA3.8@4749.31,3884.67
  Bottom Layer w5.5: J2.19@4620.57,4036.23 4685.35,4036.23 4711.7,4009.88 4711.7,3864.77 v1(4706.14,3859.2)
HD_AR_DMM_CLK: J2.10 R11.2 | length 93.9
  Bottom Layer w5.5: J2.10@4846.16,3937.81 4846.29,3937.94 R11.2@4940,3937.94
HD_AR_DMM_SYNC: J2.8 R10.2 | length 62
  Bottom Layer w5.5: J2.8@4846.16,3918.12 4904.12,3918.12 R10.2@4907,3921
HD_AR_DP0: J2.27 R88.2 | length 169.2
  Top Layer w5.5: v1(4706.93,4095.17) 4715.82,4086.28 4727.46,4086.28 4753.42,4060.33 R88.2@4767.16,4060.33
  Bottom Layer w5.5: J2.27@4620.57,4114.97 4671.25,4114.97 4675.76,4110.46 4691.64,4110.46 v1(4706.93,4095.17)
HD_AR_DP1: J2.29 R130.2 | length 310
  Top Layer w5.5: v1(4557.19,4143.31) 4605.78,4191.9 4605.78,4283.48 4617.95,4295.65 R130.2@4617.95,4361.13
  Bottom Layer w5.5: v1(4557.19,4143.31) 4565.84,4134.66 J2.29@4620.57,4134.66
HD_AR_DP2: J2.31 R132.2 | length 184.1
  Top Layer w5.5: v1(4708.21,4126.21) 4708.21,4122.45 4740.09,4090.57 R132.2@4766.31,4090.57
  Bottom Layer w5.5: J2.31@4620.57,4154.34 4696.66,4154.34 4708.21,4142.79 v1(4708.21,4126.21)
HD_AR_DP3: J2.33 R133.2 | length 140.6
  Top Layer w5.5: v1(4682.93,4176.03) 4682.93,4190.24 4720.33,4227.63 R133.2@4730.66,4227.63
  Bottom Layer w5.5: J2.33@4620.57,4174.03 4667.31,4174.03 4669.31,4176.03 v1(4682.93,4176.03)
HD_AR_DP4: J2.35 R135.2 | length 128.1
  Top Layer w5.5: v1(4705.93,4173.91) 4714.04,4182.01 R135.2@4714.04,4196.8
  Bottom Layer w5.5: J2.35@4620.57,4193.71 4621.21,4194.35 4698.76,4194.35 4705.93,4187.19 v1(4705.93,4173.91)
HD_AR_DP5: J2.37 R137.2 | length 459.2
  Top Layer w5.5: v1@4557.28,4174.75 4539.44,4156.91 4539.44,4097.34 4550.03,4086.75 4566.15,4086.75 4598.1,4054.8 4598.1,4039.08 4627.69,4009.49 4688.16,4009.49 4700.91,3996.73 4700.91,3955.09 R137.2@4681.54,3935.72
  Bottom Layer w5.5: v1(4558.03,4174) 4558.03,4198.13 4573.29,4213.4 J2.37@4620.57,4213.4
HD_AR_DP6: J2.39 R138.2 | length 158.1
  Top Layer w5.5: v1(4682.65,4241.56) 4703.85,4262.77 4720.85,4262.77 4742.55,4284.46 R138.2@4757.37,4284.46
  Bottom Layer w5.5: J2.39@4620.57,4233.08 4674.16,4233.08 v1(4682.65,4241.56)
HD_AR_DP7: J2.41 R140.2 | length 492.4
  Top Layer w5.5: v1(4557.19,4115.29) 4609.6,4062.88 4609.6,4043.84 4632.45,4020.99 4692.92,4020.99 4714.81,3999.1 R140.2@4714.81,3935.71
  Bottom Layer w5.5: v1(4557.19,4115.29) 4539.44,4133.04 4539.44,4229.07 4563.13,4252.77 J2.41@4620.57,4252.77
HD_AR_HOSTINTR1: J2.16 RA9.3 | length 96.7
  Bottom Layer w5.5: J2.16@4846.16,3996.86 4909.96,3996.86 4919.19,3987.64 RA9.3@4939.02,3987.64
HD_AR_MCUCLKOUT: J2.47 RA1.8 | length 304
  Top Layer w5.5: v1(4705.93,4292.02) 4714.77,4292.02 4726.28,4303.53 4726.28,4313.37 4756.21,4343.3 4756.21,4447.72 4756.3,4447.8 RA1.8@4756.3,4468.67
  Bottom Layer w5.5: J2.47@4620.57,4311.82 4699.4,4311.82 4705.93,4305.3 v1(4705.93,4292.02)
HD_AR_OSC_CLKOUT: J2.45 RA1.7 | length 274.3
  Top Layer w5.5: v1(4677.93,4292.14) 4677.93,4300.43 4691.13,4313.64 4710.28,4313.64 4744.5,4347.85 4744.5,4435.74 4740.55,4439.7 RA1.7@4740.55,4468.67
  Bottom Layer w5.5: J2.45@4620.57,4292.14 v1(4677.93,4292.14)
HD_AR_PMIC_CLKOUT_SOP2: J2.49 RA1.5 | length 216
  Top Layer w5.5: v1(4677.93,4334.51) 4721.5,4378.08 4721.5,4426.22 4711.5,4436.22 4711.5,4455.32 4709.05,4457.77 RA1.5@4709.05,4468.67
  Bottom Layer w5.5: J2.49@4620.57,4331.51 4623.57,4334.51 v1(4677.93,4334.51)
HD_AR_SCL: J2.55 RA2.5 | length 144.3
  Top Layer w5.5: v1(4539.66,4372.53) 4539.66,4388.23 4556.98,4405.56 RA2.5@4556.98,4413.17
  Bottom Layer w5.5: v1(4539.66,4372.53) 4539.66,4384.9 4546.38,4391.63 4619.5,4391.63 J2.55@4620.57,4390.56
HD_AR_SDA: J2.53 RA2.6 | length 101.8
  Top Layer w5.5: v1(4563.2,4373.88) 4563.2,4390.63 4572.73,4400.16 RA2.6@4572.73,4413.17
  Bottom Layer w5.5: v1(4563.2,4373.88) 4566.2,4370.88 J2.53@4620.57,4370.88
HD_AR_TCK: J2.15 RA4.7 | length 164.6
  Top Layer w5.5: v1(4552.59,4003.26) 4569.09,4003.26 4576.29,4010.46 4592.85,4010.46 4613.18,3990.14 4613.18,3968.8 RA4.7@4612.69,3968.32
  Bottom Layer w5.5: v1(4552.59,4003.26) 4558.99,3996.86 J2.15@4620.57,3996.86
HD_AR_TDI: J2.11 RA4.5 | length 102.8
  Top Layer w5.5: RA4.5@4644.19,3968.32 4678.62,3968.32 v1(4681.54,3965.4)
  Bottom Layer w5.5: J2.11@4620.57,3957.49 4671.42,3957.49 4673.64,3957.49 v1(4681.54,3965.4)
HD_AR_TDO_SOP0: J2.17 RA4.6 | length 155.4
  Top Layer w5.5: RA4.6@4628.44,3968.32 4628.44,3984.53 4633.29,3989.38 v1(4683.16,3989.38)
  Bottom Layer w5.5: J2.17@4620.57,4016.55 4670.75,4016.55 4683.16,4004.13 v1(4683.16,3989.38)
HD_AR_TMS: J2.13 RA4.8 | length 146.7
  Top Layer w5.5: v1(4551.95,3978.41) 4559.05,3985.51 4573.47,3985.51 4585.23,3997.26 4589.79,3997.26 4596.94,3990.11 RA4.8@4596.94,3968.32
  Bottom Layer w5.5: v1(4551.95,3978.41) 4619.34,3978.41 J2.13@4620.57,3977.18
HD_AR_WARMRST: J2.51 RA1.6 | length 251.7
  Top Layer w5.5: v1(4705.93,4334.39) 4733,4361.46 4733,4430.98 4724.8,4439.18 RA1.6@4724.8,4468.67
  Bottom Layer w5.5: J2.51@4620.57,4351.19 4666.81,4351.19 4672.24,4356.63 4693.97,4356.63 4705.93,4344.67 v1(4705.93,4334.39)
HD_SPI_CLK1: J2.21 RA3.7 | length 396.4
  Top Layer w5.5: v1(4679.93,4055.92) 4668.47,4067.38 4628.14,4067.38 4621.38,4060.62 4621.38,4048.32 4637.22,4032.49 4697.69,4032.49 4733.08,3997.1 4733.08,3926.57 4765.06,3894.59 RA3.7@4765.06,3884.67
  Bottom Layer w5.5: J2.21@4620.57,4055.92 v1(4679.93,4055.92)
HD_SPI_MISO1: J2.25 RA3.5 | length 325.8
  Top Layer w5.5: v1(4683.12,4092.71) 4701.05,4074.78 4713.3,4074.78 4756.08,4032.01 4756.08,3936.1 4796.56,3895.62 RA3.5@4796.56,3884.67
  Bottom Layer w5.5: J2.25@4620.57,4095.29 4623.14,4092.71 v1(4683.12,4092.71)
HD_SPI_MOSI1: J2.23 RA3.6 | length 295.7
  Top Layer w5.5: v1(4705.93,4055.8) 4744.58,4017.15 4744.58,3931.34 4780.81,3895.1 RA3.6@4780.81,3884.67
  Bottom Layer w5.5: J2.23@4620.57,4075.6 4670.79,4075.6 4672.47,4073.92 4687.81,4073.92 v1(4705.93,4055.8)
INTN: R95.1 TP46.1 U10.11 | length 138.2
  Bottom Layer w5.5: TP46.1@5159.8,4472.11 5169.45,4462.46 5223.59,4462.46 5232.68,4453.37 R95.1@5232.68,4444.39 ; R95.1@5233.19,4444.39 5244.43,4444.39 5257.65,4457.6 U10.11@5276.29,4457.6
JTAG_TCK: J7.4 U8.25 | length 555.3
  Top Layer w5.5: v1(5684.62,3977.5) 5723.05,3977.5 U8.25@5723.3,3977.25
  Sig2 w4.2: v1(5684.62,3977.5) 5707.06,3999.94 5707.06,4312.86 5686.47,4333.46 J7.4@5686.47,4476.19
JTAG_TDI: J7.8 R113.1 U8.27 | length 1196.3
  Top Layer w5.5: R113.1@5258.37,4455.49 5314.86,4455.49 5372.59,4397.76 5617.31,4397.76 5659.55,4440 5750.28,4440 J7.8@5786.47,4476.19 ; U8.27@5762.67,3977.25 5762.67,3958.37 v1(5774.37,3946.67)
  Sig2 w4.2: v1(5774.37,3946.67) 5723.89,3997.15 5723.89,4377.98 5747.37,4401.46 5747.37,4437.09 J7.8@5786.47,4476.19
JTAG_TDO: J7.6 U8.26 | length 575.8
  Top Layer w5.5: v1(5737.37,3949.46) 5742.99,3955.08 U8.26@5742.99,3977.25
  Sig2 w4.2: J7.6@5736.47,4476.19 5736.47,4404.98 5715.49,4384.01 5715.49,3969.34 5735.37,3949.46 v1(5737.37,3949.46)
JTAG_TMS: J7.2 U8.24 | length 533.9
  Top Layer w5.5: v1(5673.78,4002.46) 5673.97,4002.65 5697.52,4002.65 U8.24@5697.71,4002.84
  Sig2 w4.2: J7.2@5636.47,4476.19 5636.47,4371.58 5698.66,4309.38 5698.66,4029 5673.78,4004.12 v1(5673.78,4002.46)
MRDY: TP16.1 U8.21 | length 81.4
  Top Layer w5.5: TP16.1@5629.37,4093.46 5643.37,4093.46 5674.94,4061.9 U8.21@5697.71,4061.9
NetA1_4: A1.4 C99.1 C104.1 | length 143.8
  Top Layer w12: C99.1@6348.66,4550.46 6430.41,4550.46 A1.4@6492.49,4550.46
NetC8_1: C8.1 U4.4 | length 99.9
  Bottom Layer w5.5: C8.1@6401.4,3719.01 6415.01,3719.01 6420.75,3724.75 6420.75,3759.35 6407.77,3772.33 U4.4@6407.77,3797.49
NetC13_2: C13.2 U7.9 | length 78.7
  Bottom Layer w5.5: C13.2@5237.19,4028.9 5248.88,4028.9 5256.01,4021.77 5256.01,4001.61 5265.35,3992.27 U7.9@5265.35,3968.74
NetC21_2: C21.2 L1.2 | length 34.8
  Top Layer w12: L1.2@5994.11,4324.41 C21.2@6028.92,4324.41
NetC22_1: C22.1 L6.2 L9.1 | length 125.1
  Top Layer w12: L6.2@5903.37,4415.16 5903.37,4439.99 L9.1@5930.04,4466.65 5956.7,4439.99 C22.1@5956.7,4415.16
NetC24_1: C24.1 U8.23 | length 65.2
  Top Layer w5.5: C24.1@5640.38,4003.46 5642.33,4003.46 5661.39,4022.52 U8.23@5697.71,4022.52
NetC41_1: C41.1 L9.2 L10.1 | length 168.6
  Top Layer w12: L9.2@5930.04,4504.05 5930.04,4515.5 cw(c5965,4515.5) 5965,4550.46 C41.1@5975.28,4550.46 5995.28,4550.46 L10.1@6067.28,4550.46
NetC43_2: C43.2 FL12.1 U12.3 | length 65.8
  Bottom Layer w10: FL12.1@5469.78,4210.46 5475.18,4210.46 5477.31,4212.59 C43.2@5497.81,4212.59
  Bottom Layer w12: FL12.1@5469.78,4210.46 U12.3@5469.78,4247.39
NetC93_1: C93.1 C99.2 | length 83.6
  Top Layer w12: C93.1@6225.66,4550.46 C99.2@6309.29,4550.46
NetC93_2: C93.2 L10.2 | length 81.6
  Top Layer w12: L10.2@6104.68,4550.46 C93.2@6186.29,4550.46
NetC106_2: C106.2 R119.1 R126.2 | length 341.8
  Sig1 w10: v1(5433.56,4476.78) 5494.34,4416 v1(5609,4416)
  Bottom Layer w10: R126.2@5425.41,4410.54 5425.41,4468.62 v1(5433.56,4476.78) ; R119.1@5539.74,4410.82 C106.2@5574,4410.82 5604.03,4410.82 5609,4415.79 v1(5609,4416)
NetC108_2: C108.2 FL3.1 U17.3 | length 78.1
  Top Layer w10: FL3.1@6156,3855.69 6156.31,3856 C108.2@6197.97,3856 6207.97,3856 6210.76,3853.2 U17.3@6232.85,3853.2
NetC110_2: C110.2 R114.1 R117.2 | length 224.3
  Top Layer w4: R114.1@6397.76,3928.98 6398.78,3930 v1(6433,3930) ; R117.2@6397.85,3803.83 6405.69,3795.99 6437.31,3795.99 C110.2@6440,3793.3 ; v1(6435.31,3826.69) 6440.7,3821.3 6440.7,3794 C110.2@6440,3793.3 ; C110.2@6440,3795.27 C110.2@6440,3793.3
  Sig2 w4.2: v1(6433,3930) 6433,3829 v1(6435.31,3826.69)
NetD1_2: D1.2 FL2.2
NetD2_2: D2.2 FL11.2
NetJ2_12: J2.12 RA9.1 | length 93.4
  Bottom Layer w5.5: J2.12@4846.16,3957.49 4914.14,3957.49 4915.49,3956.14 RA9.1@4939.02,3956.14
NetJ2_14: J2.14 RA9.2 | length 95.1
  Bottom Layer w5.5: J2.14@4846.16,3977.18 4913.28,3977.18 4918.58,3971.89 RA9.2@4939.02,3971.89
NetJ2_18: J2.18 RA9.4 | length 98.3
  Bottom Layer w5.5: J2.18@4846.16,4016.55 4917.47,4016.55 4930.63,4003.38 RA9.4@4939.02,4003.38
NetJ2_22: J2.22 RA8.1 | length 91.6
  Bottom Layer w5.5: J2.22@4846.16,4055.92 4903.41,4055.92 4919.74,4072.25 RA8.1@4931.04,4072.25
NetJ2_24: J2.24 RA8.2 | length 90
  Bottom Layer w5.5: J2.24@4846.16,4075.6 4899.11,4075.6 4911.5,4088 RA8.2@4931.04,4088
NetJ2_28: J2.28 RA8.3 | length 91.9
  Bottom Layer w4: J2.28@4846.16,4114.97 4849.05,4117.87 4900.55,4117.87 4913.13,4105.29 4929.5,4105.29 RA8.3@4931.04,4103.74
NetJ2_30: J2.30 RA8.4 | length 93.8
  Bottom Layer w4: J2.30@4846.16,4134.66 4886.03,4134.66 4891.82,4128.87 4905.1,4128.87 4917.68,4116.29 4927.83,4116.29 RA8.4@4931.04,4119.49
NetJ2_34: J2.34 RA7.1 | length 94.1
  Bottom Layer w4: J2.34@4846.16,4174.03 4892.84,4174.03 4897.18,4178.37 4906.52,4178.37 4920.55,4192.4 4929.32,4192.4 RA7.1@4931.69,4190.03
NetJ2_36: J2.36 RA7.2 | length 94.1
  Bottom Layer w4: J2.36@4846.16,4193.71 4892.84,4193.71 4897.18,4189.37 4901.96,4189.37 4916,4203.4 4929.32,4203.4 RA7.2@4931.69,4205.78
NetJ2_40: J2.40 RA7.3 | length 93.3
  Bottom Layer w4: J2.40@4846.16,4233.08 4892.84,4233.08 4896.4,4236.64 4909.94,4236.64 4919.3,4227.27 4923.48,4227.27 4929.23,4221.53 RA7.3@4931.69,4221.53
NetJ2_42: J2.42 RA7.4 | length 92
  Bottom Layer w4: J2.42@4846.16,4252.77 4892.84,4252.77 4898.97,4246.64 4915.49,4246.64 4924.86,4237.27 RA7.4@4931.69,4237.27
NetJ2_46: J2.46 RA6.1 | length 90.9
  Bottom Layer w4: J2.46@4846.16,4292.14 4892.84,4292.14 4897.18,4296.48 4904.46,4296.48 4914.12,4306.15 4919.89,4306.15 4922.26,4303.77 RA6.1@4930.26,4303.77
NetJ2_48: J2.48 RA6.2 | length 90.9
  Bottom Layer w4: J2.48@4846.16,4311.82 4892.84,4311.82 4897.18,4307.48 4899.9,4307.48 4903.44,4311.02 4909.57,4317.15 4919.89,4317.15 4922.26,4319.52 RA6.2@4930.26,4319.52
NetJ2_52: J2.52 RA6.3 | length 90.7
  Bottom Layer w5.5: J2.52@4846.16,4351.19 4897.66,4351.19 4913.58,4335.27 RA6.3@4930.26,4335.27
NetJ2_54: J2.54 RA6.4 | length 92.3
  Bottom Layer w5.5: J2.54@4846.16,4370.88 4899.09,4370.88 4918.95,4351.02 RA6.4@4930.26,4351.02
NetJ2_56: J2.56 RA5.1 | length 92.2
  Bottom Layer w5.5: J2.56@4846.16,4390.56 4899.25,4390.56 4917.78,4409.09 RA5.1@4930.68,4409.09
NetJ2_57: J2.57 R14.1 | length 428.2
  Top Layer w5.5: v1(4831,4471.63) 4831,4488.23 4836.24,4493.46 R14.1@4886,4493.46
  Bottom Layer w5.5: J2.57@4620.57,4410.25 4669.54,4410.25 4678.95,4400.84 4693.94,4400.84 4711.09,4417.99 4711.09,4516 4723.3,4528.21 4785.55,4528.21 4831,4482.76 v1(4831,4471.63)
NetJ2_58: J2.58 RA5.2 | length 90.6
  Bottom Layer w5.5: J2.58@4846.16,4410.25 4901.51,4410.25 4916.1,4424.84 RA5.2@4930.68,4424.84
NetJ2_59: J2.59 R12.1 | length 505.4
  Bottom Layer w5.5: J2.59@4620.57,4429.93 4579.07,4429.93 4575,4434 4575,4491 4649.45,4565.45 4690.36,4565.45 4713.81,4542 4788.02,4542 4834.56,4495.46 R12.1@4916.37,4495.46
NetJ2_60: J2.60 RA5.3 | length 88.9
  Bottom Layer w5.5: J2.60@4846.16,4429.93 4901.9,4429.93 4912.56,4440.59 RA5.3@4930.68,4440.59
NetJ4_1: J4.1 R185.2 | length 1327.2
  Top Layer w5.5: J4.1@4655.33,4261.92 4686.74,4261.92 4699.09,4274.27 4713.5,4274.27 4751.62,4312.39 v1(4756.43,4312.39) ; v1(5497.37,3826.46) 5497.37,3844.68 5511.35,3858.66 R185.2@5511.35,3882.46
  Sig2 w4.2: v1(4756.43,4312.39) 4981.45,4312.38 5020.9,4351.83 5040.54,4351.83 5113.56,4278.81 5113.56,4154.64 5283.07,3985.13 5283.07,3862.02 5347.22,3797.87 5468.78,3797.87 v1(5497.37,3826.46)
NetJ4_2: J4.2 R184.2 | length 1631.1
  Top Layer w5.5: J4.2@4655.33,4242.23 4634.63,4242.23 4630.69,4246.17 4630.69,4275.86 4660.18,4305.35 4660.18,4341.86 4710,4391.68 4710,4421.45 4700,4431.45 4700,4450.56 v1(4690.34,4460.22) ; v1@5545.1,3923.87 5562.38,3906.59 R184.2@5562.38,3894.8
  Sig2 w4.2: v1(4690.34,4460.22) 4709.52,4441.04 4966.8,4441.04 4966.98,4440.86 4975.27,4440.86 5131.15,4284.99 5131.15,4160.82 5299.87,3992.09 5299.87,3868.98 5351.58,3817.27 5443.23,3817.27 5545.6,3919.63 v1(5545.6,3924.37)
NetJ4_3: J4.3 R183.2 | length 1602.8
  Top Layer w5.5: J4.3@4655.33,4222.55 4690.14,4222.55 v1(4709.72,4242.13) ; v1(5575.84,3921.94) 5593.19,3904.59 R183.2@5593.19,3895.87
  Sig2 w4.2: v1(4709.72,4242.13) 4726.14,4242.13 4742.4,4258.39 4742.4,4258.61 4786.62,4302.83 4983.78,4302.83 5024.38,4343.43 5037.06,4343.43 5105.16,4275.33 5105.16,4151.16 5274.67,3981.65 5274.67,3858.54 5345.04,3788.17 5489.57,3788.17 5489.82,3788.41 5631.72,3788.41 5645.37,3802.06 5645.37,3852.41 v1(5575.84,3921.94)
NetJ4_5: J4.5 R182.2 | length 220.1
  Top Layer w5.5: R182.2@4650.14,4360.81 4648.68,4359.35 4648.68,4310.11 4619.19,4280.63 4619.19,4194.32 4630.34,4183.18 J4.5@4655.33,4183.18
NetJ8_1: J8.1 R126.1 U12.6 | length 219.8
  Bottom Layer w4: J8.1@5409.37,4535.46 5454.32,4490.51 5454.32,4467.02 5477.53,4443.82 5477.53,4423.28 R126.1@5464.78,4410.54 5477.53,4397.79 5477.53,4380.36 5469.78,4372.61 U12.6@5469.78,4357.63
NetJ8_3: J8.3 R119.2 U12.7 | length 219.8
  Bottom Layer w4: U12.7@5495.37,4357.63 5495.37,4371.72 5487.63,4379.47 5487.63,4398.08 R119.2@5500.37,4410.82 5487.63,4423.57 5487.63,4448 5464.42,4471.2 5464.42,4490.51 J8.3@5509.37,4535.46
NetJ9_1: J9.1 R109.2 | length 2240.7
  Top Layer w5.5: R109.2@3744.93,4012.38 3754.32,4003 3759.5,4003 3763.64,3998.86 3763.64,3993.5 v1(3773.02,3984.13) ; v1(5117.78,4372) 5117.78,4347.88 5104,4334.1 5104,4267.56 5146.39,4225.17 5232.96,4225.17 J9.1@5232.96,4223.56
  Sig1 w4.2: v1(3773.02,3984.13) 3789.15,3968 3897.5,3968 3913.75,3984.25 3944.25,3984.25 3982.78,4022.78 3982.78,4213.56 4000.43,4231.21 4148.66,4231.21 4179.85,4200.02 4204.85,4200.02 4243.61,4238.78 4285.29,4238.78 ; 4285.46,4238.89 4291.67,4245.1 4294.06,4245.1 4405.1,4245.1 4414.28,4254.28 4512.93,4254.28 4593,4334.35 4593,4467 4614,4488 4630,4488 4678.8,4439.2 4911.5,4439.2 4961.3,4489 5098.57,4489 5131,4456.57 5131,4385.22 v1(5117.78,4372)
NetJ10_1: J10.1 R117.1 U17.6 | length 279.7
  Top Layer w4: U17.6@6343.09,3853.2 6356.9,3853.2 6364.64,3860.95 6380.11,3860.95 R117.1@6397.85,3843.2 6416.47,3861.82 6444.8,3861.82 6467.6,3839.02 6467.6,3813.1 6485.75,3794.95 6498.05,3794.95 J10.1@6543,3750